# Altium PCB IR_daughter_board.PcbDoc
Units mil, origin at the board's own origin, x right, y up, seen from the top; angles counter-clockwise.
Board outline 6000 x 4000 mil, 2 copper layers (Top Layer, Bottom Layer); 13 components, 7 nets, 32 pads, 0 vias.
Unrouted connection lines stored in the file: 25.
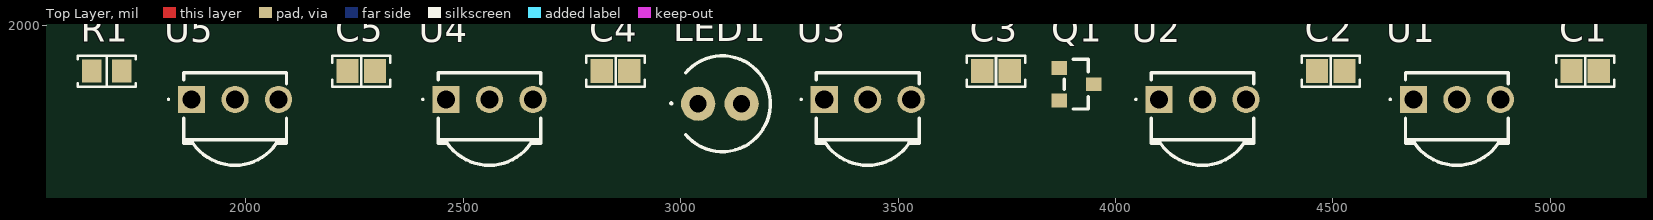
[diagram p0: Top Layer view]
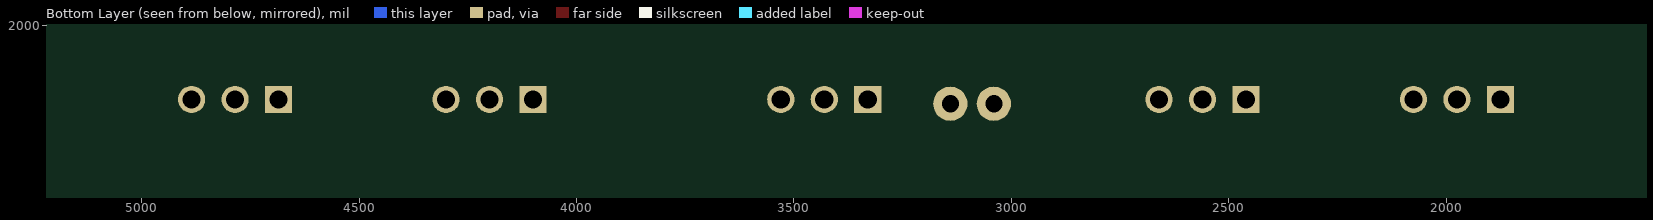
[diagram p1: Bottom Layer view, seen from below]

## Layer stack, top to bottom
Top Solder: solder mask 0.4, Solder Resist, Dk 3.5
Top Layer: signal copper 1.4
Dielectric 1: dielectric 12.6, FR-4, Dk 4.8
Bottom Layer: signal copper 1.4
Bottom Solder: solder mask 0.4, Solder Resist, Dk 3.5

## Board outline
1000,1000 7000,1000 7000,5000 1000,5000

## Design rules (kind name [scope] priority, off if disabled: settings)
Clearance [All] p1: gap=10 ignorepadtopadclearanceinfootprint=FALSE except(0: Arc-Hole Track-Hole SMDPad-Hole THPad-Hole Via-Hole Fill-Hole Poly-Hole Region-Hole Text-Hole)
PolygonConnect [All] p1: connectstyle=Relief reliefconductorwidth=10 reliefentries=4 polygonreliefangle="90 Angle" airgapwidth=10
RoutingVias [All] p1: holewidth=28 width=50 viastyle="Through Hole" minholewidth=28 minwidth=50 maxholewidth=28 maxwidth=50
SolderMaskExpansion [All] p1: expansion=4 istentingtop=FALSE
Width [All] p1: maxlimit=10 minlimit=10 preferedwidth=10
30 further rules are at their usual default settings.

## Components (designator, comment, footprint, x,y, rotation, side; value= is the part's Value field where it differs from the comment)
C1 "0.1 µF" "CAP 0805_2012" 5080,1895 r0 top
C2 "0.1 µF" "CAP 0805_2012" 4495,1895 r0 top
C3 "0.1 µF" "CAP 0805_2012" 3725,1895 r0 top
C4 "0.1 µF" "CAP 0805_2012" 2850,1895 r0 top
C5 "0.1 µF" "CAP 0805_2012" 2265,1895 r0 top
LED1 "SFH_4546" SFH_4556P 3090,1820 r0 top
Q1 "2N7002K-7" "DIODES SOT-23-3" 3910,1865 r0 top
R1 "270 Ohms" "RES 0805_2012" 1680,1895 r0 top
U1 "TSOP94638" TSOP94638 4685,1830 r0 top
U2 "TSOP94638" TSOP94638 4100,1830 r0 top
U3 "TSOP94638" TSOP94638 3330,1830 r0 top
U4 "TSOP94638" TSOP94638 2460,1830 r0 top
U5 "TSOP94638" TSOP94638 1875,1830 r0 top

## Footprints (in the part's own frame and the unit in brackets; to place one, negate y for a bottom-side part, rotate by r counter-clockwise, add the part's x,y. Pads: shape width x height; smd on the part's side, far side on the other; paste and mask are expansions set on the pad)
"CAP 0805_2012" [mm] "Chip Capacitor, 2-Leads, Body 2.00x1.20mm, IPC Medium Density"
  rect 1.3x1.4 smd: 1(-0.8,0) 2(0.8,0)
  silkscreen extent -1.7,-0.9 1.7,0.9, body extent -1,-0.64 1,0.64, height 1.26
"DIODES SOT-23-3" [mm] "SOT23, 3-Leads, Body 2.90x2.40mm, Pitch 0.95mm, IPC Medium Density"
  rect 0.9x0.8 smd: 1(-1,0.95) 2(-1,-0.95) 3(1,0)
  silkscreen extent -0.7,-1.45 0.7,1.45, body extent -1.41,-1.45 1.41,1.45, height 1.5
"RES 0805_2012" [mm] "Chip Resistor, 2-Leads, Body 2.00x1.25mm, IPC Medium Density"
  rect 1.15x1.35 smd: 1(-0.875,0) 2(0.875,0)
  silkscreen extent -1.7,-0.9 1.7,0.9, body extent -1,-0.62 1,0.63, height 0.6
SFH_4556P [mm]
  round 2 hole 1: 1(-1.27,0) 2(1.27,0)
  silkscreen extent -2.86,-2.8 2.94,2.8
TSOP94638 [mm]
  rect 1.59x1.59 hole 1.06: 1(0,0)
  round 1.59 hole 1.06: 2(2.54,0) 3(5.08,0)
  silkscreen extent -1.4,-3.85 5.54,1.55

## Part data
C1 C2 C3 C4 C5: library part 0805B104K250CT, "CAP CER 0.1UF 25V X7R 0805", Device Package="0805 (2012 Metric)", manufacturer="Walsin Technology Corporation", Operating Temperature="-55°C ~ 125°C", Supplier Part Number 1=1292-1566-1-ND, Temperature Coefficient=X7R, Tolerance=±10%, Voltage - Rated=25V, Applications="General Purpose", Capacitance="0.1 µF", componentlink1description=Datasheet, componentlink1url=http://www.passivecomponent.com/wp-content/uploads/2018/10/MLCC.pdf, componentlink2description="DigiKey Link", componentlink2url=https://www.digikey.com/en/products/detail/walsin-technology-corporation/0805B104K250CT/9355063, lastupdated="2/9/2024 8:16:02 PM", Lifecycle Status=Active, Minimum Order=1, Mounting Type="Surface Mount, MLCC", Package / Case="0805 (2012 Metric)", packaging=TapeAndReel, Part Number=0805B104K250CT, Part Status=Active, partid=4879, price=0.01, series=-, Size / Dimension="0.079\" L x 0.049\" W (2.00mm x 1.25mm)", Supplier 1=DigiKey, Thickness (Max)="0.035\" (0.90mm)"
LED1: "LED", Manufacturer_Name="ams OSRAM", Manufacturer_Part_Number="SFH 4546", Mouser Part Number=720-SFH4546, Datasheet Link=https://datasheet.datasheetarchive.com/originals/distributors/DKDS41/DSANUWW0036912.pdf, Mouser Price/Stock=https://www.mouser.co.uk/ProductDetail/OSRAM-Opto-Semiconductors/SFH-4546?qs=VcOkZLzzauarreCVxaCHEQ%3D%3D
Q1: "MOSFET N-CH 60V 380MA SOT23-3", Current - Continuous Drain (Id) @ 25°C="380mA (Ta)", Drain to Source Voltage (Vdss)="60 V", Drive Voltage (Max Rds On,  Min Rds On)="5V, 10V", Input Capacitance (Ciss) (Max) @ Vds="50 pF @ 25 V", manufacturer="Diodes Incorporated", Operating Temperature="-55°C ~ 150°C (TJ)", Package / Case="TO-236-3, SC-59, SOT-23-3", Power Dissipation (Max)="370mW (Ta)", Supplier Device Package=SOT-23-3, Supplier Part Number 1=2N7002K-7DICT-ND, componentlink1description=Datasheet, componentlink1url=https://www.diodes.com/assets/Datasheets/ds30896.pdf, componentlink2description="DigiKey Link", componentlink2url=https://www.digikey.com/en/products/detail/diodes-incorporated/2N7002K-7/1934378, FET Type=N-Channel, Gate Charge (Qg) (Max) @ Vgs="0.3 nC @ 4.5 V", lastupdated="6/3/2024 8:15:18 PM", Lifecycle Status=Active, Minimum Order=1, Mounting Type="Surface Mount", packaging=TapeAndReel, Part Number=2N7002K-7, Part Status=Active, price=0.02, Rds On (Max) @ Id, Vgs="2Ohm @ 500mA, 10V", series=-, Supplier 1=DigiKey, Technology="MOSFET (Metal Oxide)", Vgs (Max)=±20V, Vgs(th) (Max) @ Id="2.5V @ 1mA"
R1: library part CRG0805F270R, "RES SMD 270 OHM 1% 1/8W 0805", Device Package="0805 (2012 Metric)", manufacturer="TE Connectivity Passive Product", Operating Temperature="-55°C ~ 155°C", Power (Watts)="0.125W, 1/8W", Supplier Device Package=0805, Supplier Part Number 1=A126355CT-ND, Temperature Coefficient=±100ppm/°C, Tolerance=±1%, componentlink1description=Datasheet, componentlink1url=https://www.te.com/commerce/DocumentDelivery/DDEController?Action=srchrtrv&DocNm=1773204&DocType=DS&DocLang=English, componentlink2description="DigiKey Link", componentlink2url=https://www.digikey.com/en/products/detail/te-connectivity-passive-product/CRG0805F270R/2380878, Composition="Thick Film", Height - Seated (Max)="0.026\" (0.65mm)", lastupdated="2/8/2024 9:02:34 PM", Lifecycle Status=Active, Minimum Order=1, Number of Terminations=2, Package / Case="0805 (2012 Metric)", packaging=TapeAndReel, Part Number=CRG0805F270R, Part Status=Active, partid=28942, price=0.01, Resistance="270 Ohms", series="CRG, Neohm", Size / Dimension="0.079\" L x 0.049\" W (2.00mm x 1.25mm)", Supplier 1=DigiKey
U1 U2 U3 U4 U5: "Integrated Circuit", Manufacturer_Name=Vishay, Mouser Part Number=78-TSOP94638, Arrow Part Number=TSOP94638, Arrow Price/Stock=https://www.arrow.com/en/products/tsop94638/vishay, Datasheet Link=https://www.vishay.com/docs/82836/tsop946.pdf, Height=10.45mm, Manufacturer_Part_Number=TSOP94638, Mouser Price/Stock=https://www.mouser.co.uk/ProductDetail/Vishay-Semiconductors/TSOP94638?qs=byeeYqUIh0Mp1x6QgpoyDQ%3D%3D

## Nets (pads, with @x,y where several pads share a name; then routed paths per layer and width w, separated by ;. In a path a pad name is that pad's centre, name@x,y a point inside that pad or via, vN(x,y) a via of type N, cw(c..) or ccw(c..) an arc to the next point about the centre after c; other vN are vias at no path point)
3V3: C1.2 C2.2 C3.2 C4.2 C5.2 U1.3 U2.3 U3.3 U4.3 U5.3
GND: C1.1 C2.1 C3.1 C4.1 C5.1 R1.1 U1.2 U2.2 U3.2 U4.2 U5.2
NetLED1_1: LED1.1 R1.2
NetLED1_2: LED1.2 Q1.2
NetQ1_1: Q1.1
NetU1_1: U1.1 U2.1 U3.1 U4.1 U5.1
VBATT: Q1.3